# EAGLE board Arduino Runtime (EAGLE 6.1)
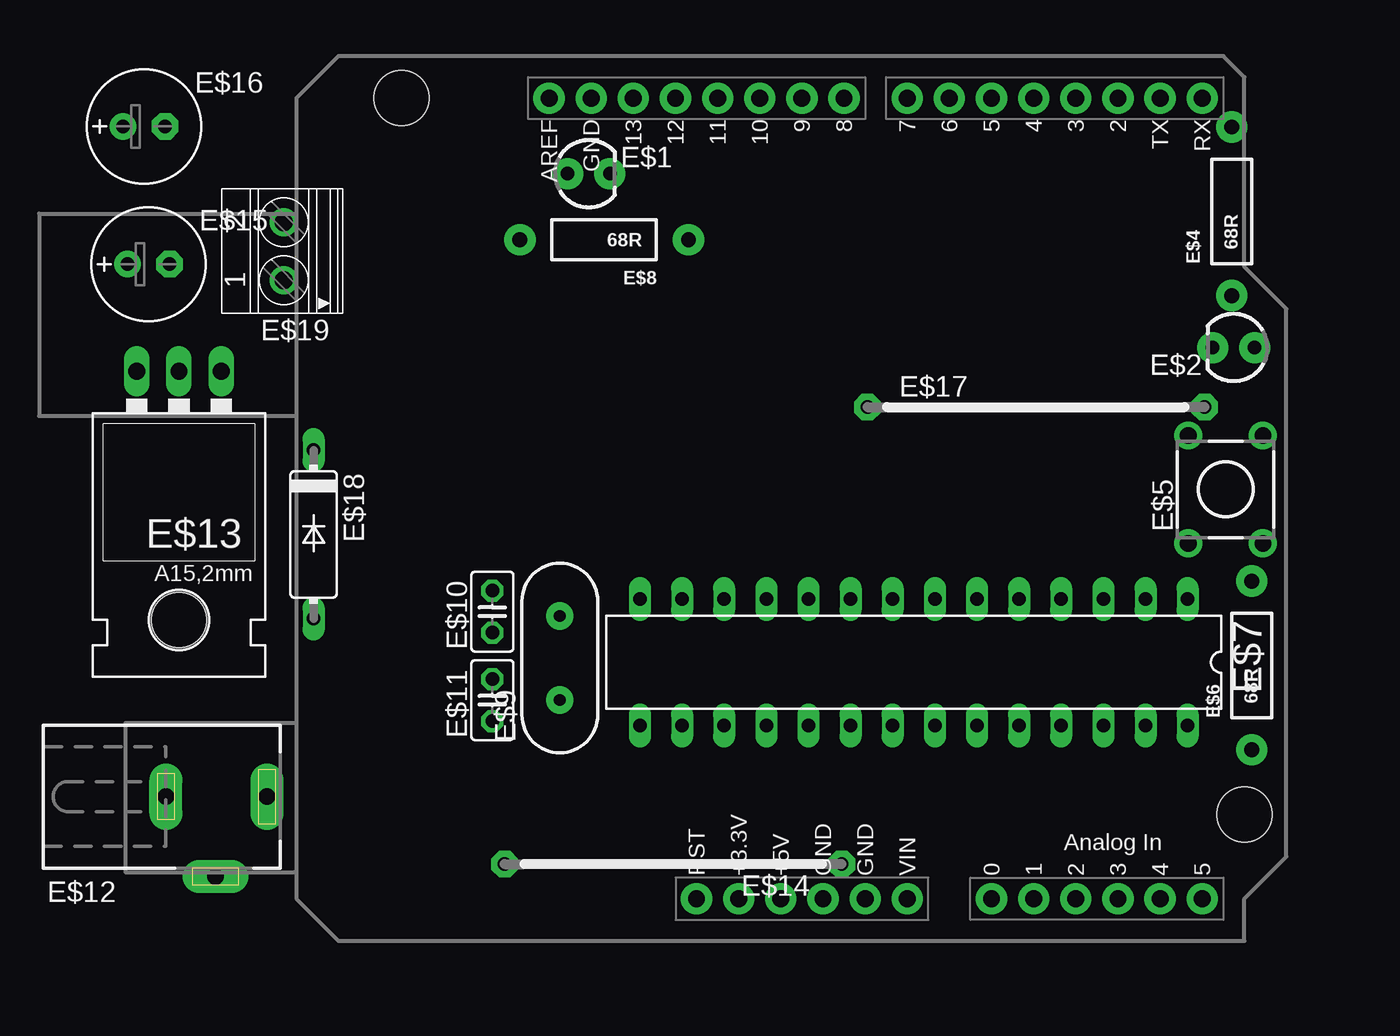
[diagram p0: board, top side]
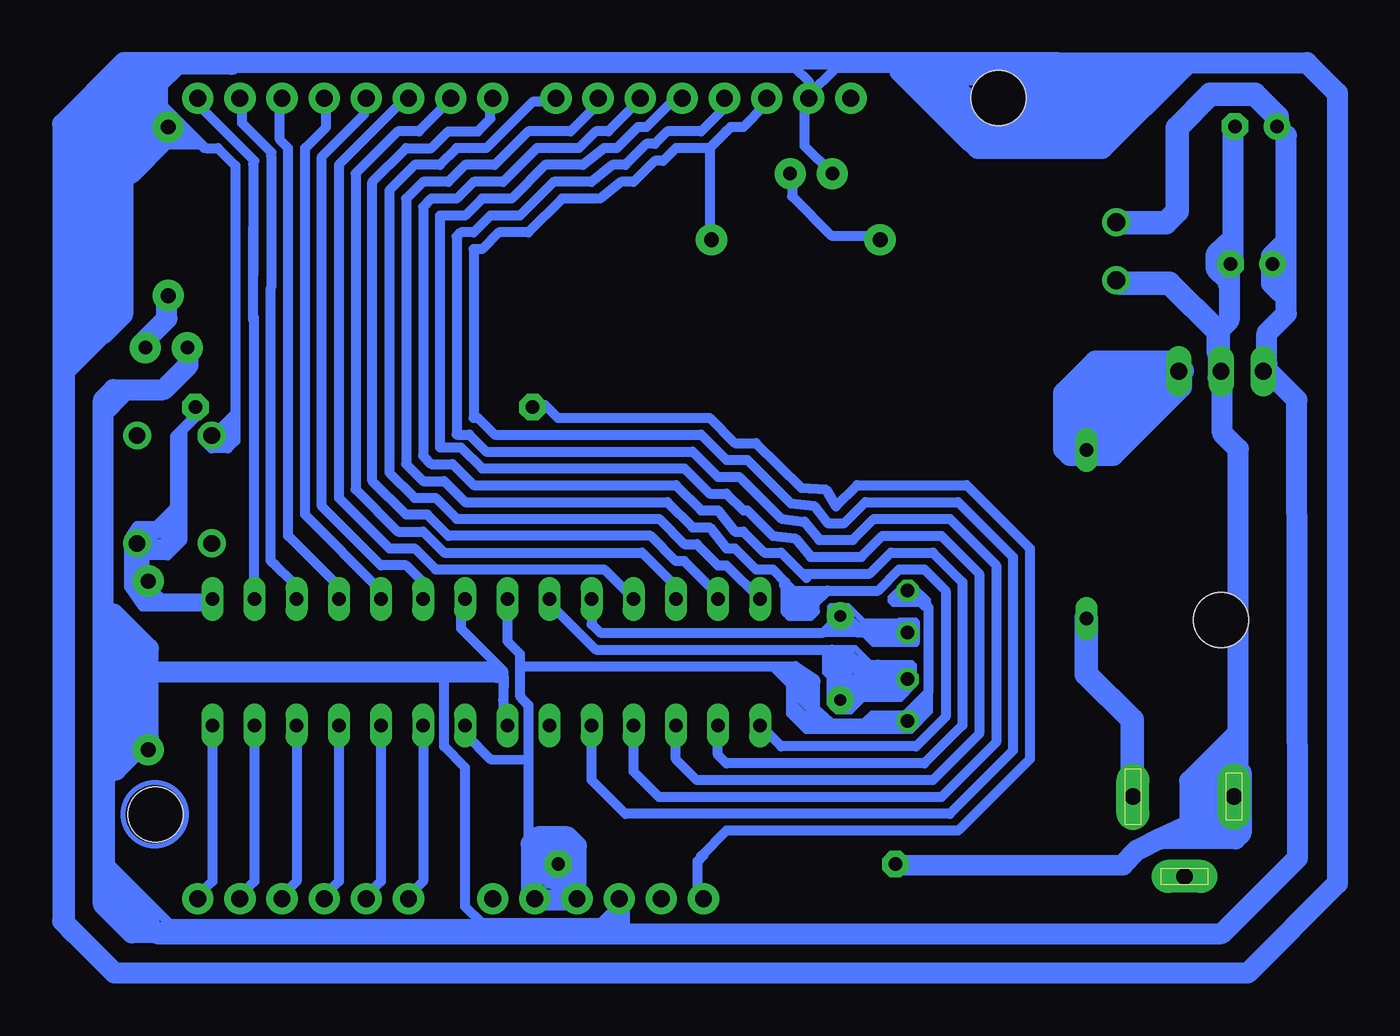
[diagram p1: board, bottom side, seen from below]

No outline drawn. Coordinates in mm, seen from the top.
Copper layers (1*16): Top 0.035mm / dielectric 1.5mm / Bottom 0.035mm
Design rules: minimum track width 10mil, minimum drill 24mil, track to track 8mil, track to pad 8mil, pad to pad 8mil, via to via 8mil, smd to smd 8mil, copper to edge 40mil, drill to drill 8mil, minimum pad ring 10mil, minimum via ring 8mil, stop-mask expansion 4mil, vias tented up to drill 0mil, thermal gap 10mil

## Footprints (pad centres in the part's own frame; a part is rotated, then mirrored left to right if it is on the bottom)
LED3MM = drill 0.813 pad 1.88: A -1.27,0; K 1.27,0
DUEMILANOVE_SHIELD = drill 1.016 pad 1.88: 3.3V 50.8,26.67; 5V 50.8,29.21; A0 50.8,41.91; A1 50.8,44.45; A2 50.8,46.99; A3 50.8,49.53; A4 50.8,52.07; A5 50.8,54.61; AREF 2.54,15.24; D2 2.54,49.53; D3 2.54,46.99; D4 2.54,44.45; D5 2.54,41.91; D6 2.54,39.37; D7 2.54,36.83; D8 2.54,33.02; D9 2.54,30.48; D10 2.54,27.94; D11 2.54,25.4; D12 2.54,22.86; D13 2.54,20.32; GND@0 50.8,31.75; GND@1 50.8,34.29; GND@2 2.54,17.78; RES 50.8,24.13; RX 2.54,54.61; TX 2.54,52.07; VIN 50.8,36.83 | hole 3.302: 45.72,57.15; 2.54,6.35
AXIAL-0.4 = drill 0.9 pad 1.88: P$1 -5.08,0; P$2 5.08,0
TL1105 = drill 1 pad 1.676: 1 -2.25,3.25; 2 2.25,3.25; 3 -2.25,-3.25; 4 2.25,-3.25
DIL28-3 = drill 0.813 long: 1 -16.51,-3.81; 2 -13.97,-3.81; 3 -11.43,-3.81; 4 -8.89,-3.81; 5 -6.35,-3.81; 6 -3.81,-3.81; 7 -1.27,-3.81; 8 1.27,-3.81; 9 3.81,-3.81; 10 6.35,-3.81; 11 8.89,-3.81; 12 11.43,-3.81; 13 13.97,-3.81; 14 16.51,-3.81; 15 16.51,3.81; 16 13.97,3.81; 17 11.43,3.81; 18 8.89,3.81; 19 6.35,3.81; 20 3.81,3.81; 21 1.27,3.81; 22 -1.27,3.81; 23 -3.81,3.81; 24 -6.35,3.81; 25 -8.89,3.81; 26 -11.43,3.81; 27 -13.97,3.81; 28 -16.51,3.81
HC49US = drill 0.7 pad 1.651: 1 -2.54,0; 2 2.54,0
C025-025X050 = drill 0.813 octagon: 1 -1.27,0; 2 1.27,0
DCJ0303 = drill 1 pad 2 long: 1 0,3.1; 2 4.8,0; 3 0,-3
78XXL = drill 1.016 long: GND 0,-3.81; IN -2.54,-3.81; OUT 2.54,-3.81 | hole 3.302: 0,11.176
20 = drill 0.813 pad 1.6 octagon: 1 -10.16,0; 2 10.16,0
E2,5-7 = drill 0.813 pad 1.6: + -1.27,0 | drill 0.813 pad 1.6 octagon: - 1.27,0
C5102 = drill 0.813 long: A 5.08,0; C -5.08,0
1751248 = drill 1.1 pad 1.7: 1 -1.75,-0.1; 2 1.75,-0.1

## Placement (x,y rotation side)
E$1  [LED3MM]  34.14,48.08 0 top
E$2  [LED3MM]  73.01,37.59 180 top
E$3  [DUEMILANOVE_SHIELD]  16.51,55.17 270 top
E$4  68R  [AXIAL-0.4]  72.91,45.81 90 top
E$5  [TL1105]  72.53,29.05 0 top
E$6  68R  [AXIAL-0.4]  74.11,18.44 90 top
E$7  ATMEGAxx8  [DIL28-3]  53.73,18.63 180 top
E$8  68R  [AXIAL-0.4]  35.07,44.09 180 top
E$9  16Mhz  [HC49US]  32.39,18.89 90 top
E$10  22p  [C025-025X050]  28.33,21.68 90 top
E$11  22p  [C025-025X050]  28.33,16.35 90 top
E$12  [DCJ0303]  11.65,10.52 270 top
E$13  [78XXL]  9.44,32.36 180 top
E$14  [20]  39.23,6.45 180 top
E$15  [E2,5-7]  7.6,42.62 0 top
E$16  [E2,5-7]  7.33,50.93 0 top
E$17  [20]  61.1,34 0 top
E$18  [C5102]  17.55,26.33 270 top
E$19  [1751248]  15.65,43.41 90 top

## Library data of the parts
E$1 E$2 = SparkFun-LED
E$3 = SparkFun-Boards
E$4 E$6 E$8 = SparkFun-Passives
E$5 = switch
E$7 = atmel
E$9 = SparkFun-FreqCtrl
E$10 E$11 E$15 E$16 = rcl
E$12 = con-jack
E$13 = SparkFun-PowerIC
E$14 E$17 = jumper
E$18 = diode
E$19 = con-phoenix-350

## Nets
S$12: E$7.14
S$104: E$7.10 E$9.2
S$105: E$7.9 E$9.1
S$107: E$11.1
S$110: E$7.4
S$111: E$7.5
S$114: E$7.28
S$115: E$7.11
S$119: E$10.2
S$120: E$7.22
S$121: E$7.27
S$122: E$7.26
S$123: E$7.25
S$124: E$7.24
S$126: E$7.21
S$127: E$7.16
S$128: E$7.15
S$130: E$7.18
S$139: E$7.3

## Tracks (layer width: path | path; a pad name or v marks a point on that pad's centre or on a via)
S$1
  Bottom 0.61: 71.44,33.96 71.44,33.29 72.5,32.24 72.5,26.51 73.27,25.73 74.44,25.73 74.77,25.4
S$2
  Bottom 0.61: 67.78,39.28 67.78,44.81
S$3
  Bottom 0.61: 53.56,2.83 72.77,2.83 76.38,6.44 76.38,11.56 74.5,13.45
S$4
  Bottom 0.61: 71.37,33.95 71.37,33.29 72.36,32.3 72.36,28.13 | 72.36,28.13 72.36,25.97 72.87,25.45 74.54,25.45 74.56,25.43 | 72.36,28.13 73.65,26.84 74.79,26.84 75.27,26.07 75.27,23.17 74.45,22 70.64,22 70.24,22.4
S$5
  Bottom 0.61: 71.33,33.76 71.33,33.31 72.06,32.57 72.06,25.95 72.94,25.07 74.47,25.07 74.5,25.05
S$6
  Bottom 0.61: 72.78,22.46 74.23,22.46 74.63,22.87
S$7
  Bottom 0.61: 74.36,22.89 74.36,26.17 74.63,26.44
S$8
  Bottom 0.61: 74.63,26.35 74.63,26.32 75.12,25.83
S$9
  Bottom 0.61: 75.1,25.63 75.1,23.18 74.83,22.91
S$10
  Bottom 0.61: 74.81,23.45 74.81,25.52 74.68,25.66
S$11
  Bottom 0.61: 74.5,26.39 73.36,26.39 72.6,27.15
S$12
  Bottom 0.61: 49.67,52.41 50.94,52.41 53.73,49.62 55.51,49.62 56.52,48.6 58.05,48.6 59.57,47.08 59.57,30.06 58.05,28.54 56.78,28.54 55.51,27.27 43.32,27.27 41.79,25.74 41.03,25.74 39.76,24.47 39.25,24.47 E$7.14
S$13
  Bottom 0.61: 72.87,26.84 73.2,26.84 74.07,25.97
S$14
  Bottom 0.61: 34.27,52.77 34.27,53.61 35.1,54.44 72.12,54.44 73.38,53.19 73.38,52.36 70.64,49.62 69.9,49.62 68.85,48.57 68.85,31.97 69.3,31.52 70.3,31.52 70.82,32.04 70.82,32.53 70.57,32.77 69.72,32.77 68.92,33.58 68.92,32.97 69.23,32.66 69.23,32.28 69.34,32.17 69.68,32.17 69.95,31.9 70.15,31.9 70.41,32.17 70.39,32.17 70.3,32.26 70.1,32.26 70.03,32.33 69.81,32.33 69.61,32.13 69.57,32.13 69.41,31.97
S$15
  Bottom 0.61: 48.14,4.51 48.14,5.39
S$16
  Bottom 0.61: 34.55,52.45 34.55,49.76 32.88,48.09
S$17
  Bottom 0.61: 36.97,52.41 36.97,52.16 38.24,50.89 39,50.89 40.27,49.62 42.3,49.62 43.06,48.86 43.57,48.86 44.84,47.59 45.6,47.59 46.87,46.57
S$18
  Bottom 0.61: 35.29,48.19 35.29,46.7 32.93,44.34 30.33,44.34 30.05,44.06
S$19
  Bottom 0.61: 40.24,44.34 40.24,49.67 39.27,50.64
S$20
  Bottom 0.61: 72.78,51.52 72.78,51.01 73.06,50.73
S$21
  Bottom 0.61: 72.88,40.68 72.88,39.11 74.5,37.49
S$22
  Bottom 0.61: 70.49,22.44 73.29,22.44 74.3,23.46
S$23
  Bottom 0.61: 47.13,46.57 49.16,46.57 51.19,44.54 52.97,44.54 53.98,43.52 54.49,43.52 54.49,33.36 54.24,33.36 53.22,32.35 40.78,32.35 39.25,30.82 37.98,30.82 35.37,28.21 33.96,28.06 33.16,27.01 32.14,27.01 30.87,28.28 25.28,28.28 21.98,24.98 21.98,13.3 25.79,9.49 45.35,9.49 47.38,11.52 47.38,14.31
S$24
  Bottom 0.61: 74.36,17.76 74.36,19.98 76.81,22.44 76.81,33.23 75.24,34.8 73.34,34.8 71.72,36.42 71.72,37.49 71.77,37.53
S$25
  Bottom 0.61: 19.45,54.64 72.28,54.64 73.23,53.7 73.23,52.08 72.53,51.38
S$26
  Bottom 0.61: 16.63,52.26 16.63,52.54 19.18,55.09 72.21,55.09 73.55,53.74 73.55,50.46 72.95,49.85 70.96,49.85 70.75,49.64
S$27
  Bottom 0.61: 71.62,50.15 71.98,50.15 72.4,50.58
S$28
  Bottom 0.61: 72.33,50.29 72.69,50.29 73.05,50.65
S$29
  Bottom 0.61: 72.76,50.56 72.76,50.44 72.71,50.4
S$30
  Bottom 1.27: 8.8,10.41 8.8,8.14
S$31
  Bottom 1.27: 48.3,4.28 48.3,7.55 48.84,8.1 50.61,8.1 51.03,7.68 51.03,4.76 50.58,4.31 48.65,4.31 48.4,4.57 48.4,6.27 49.42,7.3 49.78,7.3 49.94,7.14 49.94,5.72 49.81,5.59 49.42,5.59 49.33,5.5 49.33,5.4 49.29,5.37 49.29,5.34
S$32
  Bottom 0.61: 40.78,4.41 40.52,4.15
S$33
  Bottom 1.27: 17.23,52.09 19.12,53.98
S$34
  Bottom 0.61: 34.39,52.75 32.66,54.43 20.49,54.43
S$35
  Bottom 1.27: 29.11,6.39 15.35,6.41 14.51,7.3 12.98,8.07 11.62,8.7 10.51,8.7 8.75,10.46 8.75,8.24 8.65,8.15 11.77,8.13 12.07,8.45
S$36
  Bottom 1.27: 73.59,2.27 9.4,2.27 4.81,6.85
S$37
  Bottom 1.27: 45.72,4.51 45.72,2.77 45.74,2.75 45.76,2.75 45.85,2.83
S$38
  Bottom 1.27: 68.73,2.31 75.09,2.31 76.82,4.04 76.82,34.43 76.19,35.06 73.18,35.06 71.7,36.54 71.7,37.61 71.79,37.7
S$39
  Bottom 1.27: 14.8,10.57 14.75,15.18 17.55,17.98
S$40
  Bottom 1.27: 8.4,10.41 8.4,31.48 9.36,32.44 9.36,36.2 9.28,36.28
S$41
  Bottom 1.27: 4.82,6.82 4.87,34.44 6.73,36.31
S$42
  Bottom 1.27: 74.06,2.78 74.06,3.48 76.09,5.51 76.09,4.4 74.89,3.2
S$43
  Bottom 1.27: 70.29,54.7 71.97,54.7 72.04,54.78 73.31,54.78 | 73.31,54.78 73.94,54.78 | 73.94,54.78 75.66,53.06 75.66,39.6 76.82,38.44 76.82,52.88 74.94,54.75 71.22,54.75 71.19,54.78 | 69.1,54.66 73.2,54.66 73.31,54.78 | 73.94,54.78 75.57,54.78 79.27,51.07 79.27,3.02 78.52,2.28
S$44
  Bottom 1.27: 73.67,54.04 73.67,53.7 74.65,52.72 74.65,49.06 75.63,48.08 75.17,48.08 73.14,50.11 73.14,51.54 73.76,52.16 73.76,50.58 74,50.34
S$45
  Bottom 1.27: 74.42,37.77 74.42,37.9 72.98,39.35 72.98,40.66
S$46
  Bottom 1.27: 76.46,12.13 76.05,12.13 74.1,14.08 74.1,19.45 76.19,21.54 76.19,13.62 75.95,13.38 75.95,19.45 75.72,19.68 75.72,14.54 75.12,13.94 75.12,18.76 74.89,18.99
S$47
  Bottom 1.27: 53.09,18.02 76.51,18.02 76.6,18.11
S$48
  Bottom 1.27: 6.67,36.64 6.67,38.47 5.5,39.64 5.5,50.37 6.06,50.92
S$49
  Bottom 1.27: 8.72,50.98 8.72,42.75 8.95,42.53 8.95,39.25 9.61,38.58 9.61,35.8
S$50
  Bottom 1.27: 20.73,54.78 4.26,54.78 2.42,52.93 2.42,5.3 7.83,-0.12 76.13,-0.12 79.13,2.88 79.13,50.86 75.44,54.55
S$51
  Bottom 1.27: 76.36,40.71 76.36,38.96 78.96,36.37
S$52
  Bottom 1.27: 78.58,37.26 78.58,38.49 77.17,39.89
S$53
  Bottom 1.27: 77.64,51.59 77.64,39.62 78.29,38.97 78.29,50.58 78.45,50.74
S$54
  Bottom 1.27: 24.56,50.01 28.8,54.24
S$55
  Bottom 1.27: 27.07,53.57 27.26,53.76 26.98,53.76 24.09,50.88
S$56
  Bottom 1.27: 8.22,12 8.22,8.33 8.57,7.98 13.15,7.98 13.17,7.95
S$57
  Bottom 1.27: 8.43,14.35 11.33,11.46 11.33,8.97 11.84,8.46
S$58
  Bottom 1.27: 10.87,8.94 10.87,10.58 9.18,12.26
S$59
  Bottom 1.27: 9.02,11.78 9.02,11.14 10.36,9.8
S$60
  Bottom 1.27: 9.59,9.19 9.59,9.1 9.32,8.84
S$61
  Bottom 1.422: 6.06,50.81 6.06,51.51 7.41,52.86 10.08,52.86 12.09,50.85 12.09,45.8 12.78,45.11 15.68,45.11 15.71,45.15
S$62
  Bottom 0.61: 40.98,4.42 40.98,6.64 40.65,6.98
S$63  (via drill 0.6)
  other vias: 22.86,52.57
S$64
  Bottom 1.27: 17.55,31.53 15.44,33.65 14.8,33.65 12.08,36.37
S$65
  Bottom 1.422: 17.55,21.32 17.55,17.92 14.79,15.15 14.79,10.71 14.71,10.62
S$66
  Bottom 1.422: 11.89,36.31 11.89,35.24 15.96,31.17 18.53,31.17 18.85,31.49 18.85,34.85 16.99,36.71 12.29,36.71 11.78,36.19
S$67
  Bottom 1.422: 12.88,35.88 16.04,35.88 18.1,33.82 18.1,32.48 17.86,32.24 15.81,32.24 15.81,32.48 14.15,34.14 14.15,34.81 14.54,35.2 15.61,35.2 16.24,34.57 16.24,34.06 17.47,32.83 15.65,32.83 13.87,34.61 14.58,34.61 14.7,34.73 14.7,34.34 15.02,34.02 15.41,34.02
S$68
  Bottom 1.27: 14.69,52.08 14.69,52.17 14.01,52.85 14.59,52.85 15.17,52.27 15.55,52.27 16.03,51.79
S$69
  Bottom 1.27: 15.55,51.84 15.93,51.45 24.28,51.45 24.86,52.03 24.86,52.7 24.76,52.61
S$70
  Bottom 1.27: 26.4,54.05 12.77,54.05
S$71
  Bottom 1.422: 9.62,37.34 9.62,38.56 12.55,41.49 15.54,41.49 15.68,41.62
S$72
  Bottom 1.422: 26.02,51.67 26.02,51.6 24.07,49.66 16.63,49.66 11.76,54.54 13.3,54.54 16.89,50.95 23.84,50.95 23.91,50.88 23.91,51.64 25.79,53.52
S$73
  Bottom 1.422: 20.75,51.01 20.75,53.32 20.45,53.61
S$74
  Bottom 1.422: 20.35,51.6 20.35,52.82 19.59,53.58
S$75
  Bottom 1.422: 19.5,52.06 17.22,52.06 16.1,53.19
S$76
  Bottom 1.422: 16.33,53.19 18.9,53.19 19.33,52.76
S$77
  Bottom 1.016: 5.56,44.3 5.56,44.12 6.52,43.16 6.52,41.42 5.94,40.85
S$78
  Bottom 1.016: 9.1,41.38 9.1,41.56 9.83,42.29 9.83,43.27 9.14,43.96
S$79
  Bottom 0.406: 31.55,20.35 33.23,20.35 33.23,20.37 32.92,20.37 32.92,20.54 32.44,20.54 32.44,20.67 31.76,20.67 31.76,20.69 32.29,20.69 32.29,20.71 32.39,20.71 32.39,20.81
S$80
  Bottom 0.406: 31.02,17.72 31.15,17.72 32.23,18.8
S$81
  Bottom 0.406: 32.16,18.27 32.16,18.18 31.4,17.41
S$82
  Bottom 0.406: 31.45,17.53 31.45,17.45 32.23,16.67
S$83
  Bottom 0.406: 31.87,17.15 31.87,17.64 31.99,17.76
S$84
  Bottom 0.406: 33.28,19.15 33.28,17.99 33.03,17.74 33.03,16.12 32.6,15.68 31.76,15.68 31,16.44 28.75,16.44 27.95,17.24 27.95,18.44 28.08,18.58 31.83,18.58 31.93,18.67
S$85
  Bottom 0.406: 28.14,18.27 28.61,18.27 | 32.22,18.27 28.61,18.27 | 28.61,18.27 28.25,17.91 31.36,17.91 31.38,17.89 28.59,17.89 28.21,17.51 28.21,17.43 28.77,16.88 31.74,16.88 31.85,17 30.48,17 30.37,17.11 28.73,17.11 28.63,17.2 30.39,17.2 30.46,17.28 31.05,17.28 31.07,17.26 29.41,17.26 28.82,16.67 31.17,16.67 31.4,16.44 31.66,16.18 31.66,16.16 31.82,16 32.2,16 32.25,15.95 32.44,15.95 32.5,16 32.5,16.06 32.58,16.14 32.58,16.29 32.69,16.4 32.69,17.78 32.98,18.06 32.98,19.05 32.94,19.09 32.94,18.9 32.73,18.69 32.73,18.41 32.67,18.35 32.67,18.33 32.63,18.29 32.63,18.2 32.65,18.18 30.56,18.18 30.14,18.59
S$86
  Bottom 0.406: 33.81,19.47 31.47,19.47 30.63,18.63
S$87
  Bottom 0.406: 31.05,18.63 31.17,18.63 31.78,19.24 32.23,19.24 | 32.33,19.24 32.23,19.24 | 32.23,19.24 31.72,18.73 | 31.72,18.73 | 31.72,18.73 31.68,18.69
S$88
  Bottom 0.406: 27.81,19.76 30.41,19.76 30.94,20.29 30.48,20.29 30.27,20.08 27.99,20.08 27.78,19.87 27.78,21.05 27.85,21.13 28.84,21.13 29.07,20.9 29.07,20.77 29.05,20.75 29.05,20.79 28.77,21.07 30.98,21.07 31.91,22.01 32.98,22.01 33,21.99 33,20.96 33.36,20.6
S$89
  Bottom 0.406: 32.65,20.9 32.65,21.66 32.67,21.68 31.95,21.68 31.93,21.7 31.93,21.47 31.3,20.84 28.44,20.84 28.1,20.5 28.1,20.41 28.12,20.39 28.27,20.39 28.31,20.43 28.31,20.48 28.42,20.6 28.37,20.6 28.04,20.92
S$90
  Bottom 0.406: 27.47,22.14 29.19,22.14 29.34,22.29 29.34,22.54 28.63,23.24 28,23.24 27.95,23.19 27.93,23.19 27.13,22.39 27.13,22.01 27.05,21.93 27.38,21.93 28.06,22.62 28.29,22.62 28.46,22.79 28.65,22.79 28.67,22.77 28.71,22.77 28.9,22.58 28.9,22.5 28.96,22.44 28.75,22.44 28.69,22.39 28.31,22.39 28.29,22.37 28.2,22.37 28.16,22.41 28.33,22.41 28.41,22.48
S$91
  Bottom 0.406: 27.03,17.39 27.03,15.64 28.08,14.59 30.21,14.59 30.48,14.86
S$92
  Bottom 0.406: 29.26,14.92 28.16,14.92 28,15.07 | 28,15.07 | 28,15.07 27.24,15.83 27.24,16.08 27.22,16.1 27.43,16.1 27.64,15.89 27.64,15.87 27.95,15.57 27.95,15.49 28,15.43
S$93
  Bottom 0.406: 30,14.54 32.84,14.54 34.02,15.72
S$94
  Bottom 0.406: 29.03,15.07 31.34,14.89 31.6,14.86 32.96,14.96 33.11,15.11
S$95
  Bottom 0.406: 31.19,14.95 30.9,15.13 30.5,15.53 28.48,15.53
S$96
  Bottom 0.406: 28.71,15.38 30.33,15.38 30.35,15.36
S$97
  Bottom 0.406: 30.66,14.88 32.92,14.88 33,14.96 29.62,14.96 29.61,14.97 29.71,14.97 29.78,15.04 33.31,15.04 33.32,15.02
S$98
  Bottom 0.406: 34.03,16.25 34.47,16.25 36.41,18.2 35.65,18.2 34.38,16.94 34.38,16.83 34.22,16.66 34.22,16.58 34.19,16.55 34.35,16.55 35.7,17.9 35.45,17.9 35.37,17.98 34.99,17.98 34.47,17.46 34.47,17.16 34.25,16.94 34.25,16.99 34.33,17.08 34.33,17.27 34.3,17.3 34.3,17.41 34.33,17.43 34.49,17.43 34.63,17.3
S$99
  Bottom 0.406: 36.03,18.12 36.03,17.84 33.73,15.54
S$100
  Bottom 0.406: 32.72,23.04 35.17,23.04 35.88,23.75 35.88,23.23 35.26,22.6 35.26,21.84 34.4,21.84 34.28,21.96 34.28,22.31 34.23,22.36 34.09,22.36 33.71,22.73 35.11,22.73 35.2,22.64 35.17,22.64 34.97,22.44 34.44,22.44 34.35,22.53 34.35,22.46 34.43,22.39 34.43,22.21 34.93,22.21 34.97,22.17 35.1,22.17 35.17,22.23 35.07,22.23 35.02,22.19
S$101
  Bottom 0.406: 35.45,17.49 35.45,15.48 34.47,14.5 28.12,14.5 26.98,15.64 26.98,17.17 27.09,17.28
S$102
  Bottom 0.406: 33.35,14.67 34.17,14.67 35.36,15.86 35.36,16.6 35.3,16.66 35.17,16.66 33.49,14.98 34,14.98 35.12,16.1 35.12,16.14 35.13,16.15 35.13,16.19
S$103
  Bottom 0.61: 46.87,52.41 48.65,50.63 51.19,50.63 53.22,48.6 55,48.6 56.02,47.59 57.54,47.59 58.56,46.57 58.56,30.57 57.54,29.55 56.27,29.55 55,28.28 42.81,28.28 41.28,26.76 40.27,26.76 39.25,25.49 38.74,25.49 37.47,24.22 36.46,24.22 35.7,23.46
S$104
  Bottom 0.61: E$7.10 47.38,20.92 46.87,20.41 33.41,20.41 E$9.2 31.38,20.41 28.58,20.41
S$105
  Bottom 0.61: E$7.9 49.92,22.19 47.13,19.39 32.9,19.39 32.39,18.89 E$9.1
S$106
  Bottom 0.61: 51.44,18.38 35.09,18.38
S$107
  Bottom 0.61: 35.07,18.39 33.91,17.59 33.92,17.11 33.92,15.84 32.77,14.79 E$11.1
S$108
  Bottom 0.61: 67.7,48.86 71.26,52.41 71.26,52.67 71,52.41
S$109
  Bottom 0.61: 66.68,49.37 68.46,51.14 68.46,52.67
S$110
  Bottom 0.61: E$7.4 62.62,23.2 65.67,26.25 65.67,49.62 66.18,50.13 66.18,51.91
S$111
  Bottom 0.61: E$7.5 60.08,22.95 64.65,27.52 64.65,49.62 63.38,50.89 63.38,52.67
S$112
  Bottom 0.61: 57.29,22.44 57.29,23.2 58.56,24.47 60.08,24.47 63.64,28.03 63.64,49.11 61.1,51.65 61.1,52.67
S$114
  Bottom 0.61: E$7.28 70.24,5.42 71.26,4.41
S$115
  Bottom 0.61: 58.56,52.41 58.81,52.41 62.62,48.6 62.62,28.54 59.57,25.49 58.05,25.49 56.78,24.22 46.62,24.22 E$7.11
S$116
  Bottom 0.61: 56.02,52.67 56.02,52.41 57.79,50.63 59.06,50.63 61.6,48.09 61.6,29.05 59.06,26.5 57.54,26.5 56.27,25.23 44.33,25.23 42.3,23.2 42.3,22.7
S$117
  Bottom 0.61: 39.76,22.95 40.01,22.95 41.79,24.73 42.3,24.73 43.82,26.25 56.02,26.25 57.29,27.52 58.56,27.52 60.59,29.55 60.59,47.59 58.56,49.62 57.03,49.62 56.02,50.63 54.24,50.63 53.48,51.4 53.48,52.41 53.22,52.67
S$118
  Bottom 0.61: 28.58,17.61 30.87,17.61 32.14,16.34
S$119
  Bottom 0.61: 28.33,15.33 28.33,15.58 27.06,16.85 27.06,21.93 28.08,22.95 E$10.2
S$120
  Bottom 0.61: E$7.22 55,14.31 53.48,12.79 51.19,12.74 | 52.46,22.19 52.46,19.9 51.7,19.14 51.7,16.6 51.19,16.04 51.19,12.74 | 51.19,12.74 51.19,4.92 50.68,4.41 48.14,4.41
S$121
  Bottom 0.61: E$7.27 67.7,5.42 68.72,4.41
S$122
  Bottom 0.61: E$7.26 65.16,5.42 66.18,4.41
S$123
  Bottom 0.61: E$7.25 62.62,5.42 63.64,4.41
S$124
  Bottom 0.61: E$7.24 60.08,5.42 61.1,4.41
S$125
  Bottom 0.61: 57.54,15.07 57.54,5.42 58.56,4.41
S$126
  Bottom 0.61: 45.86,4.15 45.86,3.9 46.87,2.88 53.98,2.88 55,3.9 55,12.28 56.27,13.55 56.27,16.34 56.26,17.83 | 55.25,22.19 55.25,20.66 52.71,18.12 52.71,16.34 | 52.71,16.34 52.71,15.07 E$7.21 | 56.26,17.83 52.68,17.83 52.71,16.34 | 56.26,17.83 74.21,17.82 74.3,13.3
S$127
  Bottom 0.61: 44.59,52.41 46.36,50.63 47.13,50.63 48.14,49.62 50.68,49.62 52.71,47.59 54.49,47.59 55.51,46.57 57.03,46.57 57.54,46.06 57.54,31.08 57.03,30.57 55.76,30.57 54.49,29.3 42.3,29.3 40.78,27.77 39.76,27.77 38.74,26.5 38.24,26.5 36.97,25.23 35.95,25.23 34.68,23.96 | 34.68,23.96 34.43,23.71 | 34.68,23.96 30.62,23.96 29.35,25.23 26.81,25.23 25.03,23.46 25.03,14.82 27.31,12.54 39.25,12.54 39.76,13.04 E$7.16
S$128
  Bottom 0.61: 35.7,23.2 35.7,21.68 35.44,21.43 34.17,21.43 33.92,21.68 33.92,22.19 33.16,22.95 30.11,22.95 28.84,24.22 27.31,24.22 26.04,22.95 26.04,15.33 27.82,13.55 35.95,13.55 E$7.15
S$129
  Bottom 0.61: 42.05,52.67 42.3,52.67 44.08,50.89 44.59,50.89 45.86,49.62 46.62,49.62 47.89,48.6 50.17,48.6 52.21,46.57 53.98,46.57 55,45.55 56.52,45.55 56.52,31.59 55.25,31.59 53.98,30.32 41.79,30.32 40.27,28.79 39.25,28.79 38.24,27.77 37.98,27.77 36.46,26.25 35.11,26.1 34.17,24.98 31.12,24.98 29.85,26.25 26.3,26.25 24.01,23.96 24.01,14.31 26.81,11.52 41.03,11.52 42.3,12.79 42.3,15.07
S$130
  Bottom 0.61: 39.51,52.16 39.51,51.91 40.78,50.63 42.81,50.63 43.57,49.87 44.08,49.87 45.35,48.6 46.11,48.6 47.38,47.59 49.67,47.59 51.7,45.55 53.48,45.55 54.49,44.54 55.25,44.54 55.51,44.28 55.51,32.35 54.75,32.35 53.73,31.33 41.28,31.33 39.76,29.81 38.49,29.81 35.94,27.29 34.56,27.1 33.66,26 31.63,26 30.36,27.27 25.79,27.27 23,24.47 23,13.8 26.3,10.5 43.32,10.5 44.84,12.03 E$7.18
S$139
  Bottom 0.61: E$7.3 65.16,23.2 66.68,24.73
S$140
  Bottom 0.61: 66.69,49.15 66.69,41.23
S$141
  Bottom 0.61: 66.75,41.12 66.75,24.76 66.43,24.45
S$142
  Bottom 0.61: 67.73,39.4 67.73,22.52 67.63,22.41
S$171
  Bottom 0.61: 50.68,34.12 50.17,34.12 49.41,33.36 40.27,33.36 38.74,31.84 37.47,31.84 34.74,29.14 33.27,29.05 32.65,28.03 31.38,29.3 24.77,29.3 20.96,25.49 20.96,12.79 25.28,8.47 39.25,8.47 40.78,6.95
S$176
  Bottom 0.61: 67.79,48.62 67.79,41.95
S$196
  Bottom 0.305: 71.26,33.36 71.26,33.42 71.97,32.69 71.97,30.85 72.42,30.44 72.42,26.25 72.78,25.74 74.81,25.74
  Bottom 0.61: 74.3,23.71 74.3,25.23 74.81,25.74
(copper drawn outside any net)
  shapes: Bottom circle x1